# Altium PCB PCB.PcbDoc (part 2 of 2)
Units mm, origin at the board's own origin, x right, y up, seen from the top; angles counter-clockwise.
Board outline 130 x 130 mm, 2 copper layers (Top Layer, Bottom Layer), stack 1.571 mm thick; 113 components, 99 nets, 422 pads, 245 vias.
Unrouted connection lines stored in the file: 122.
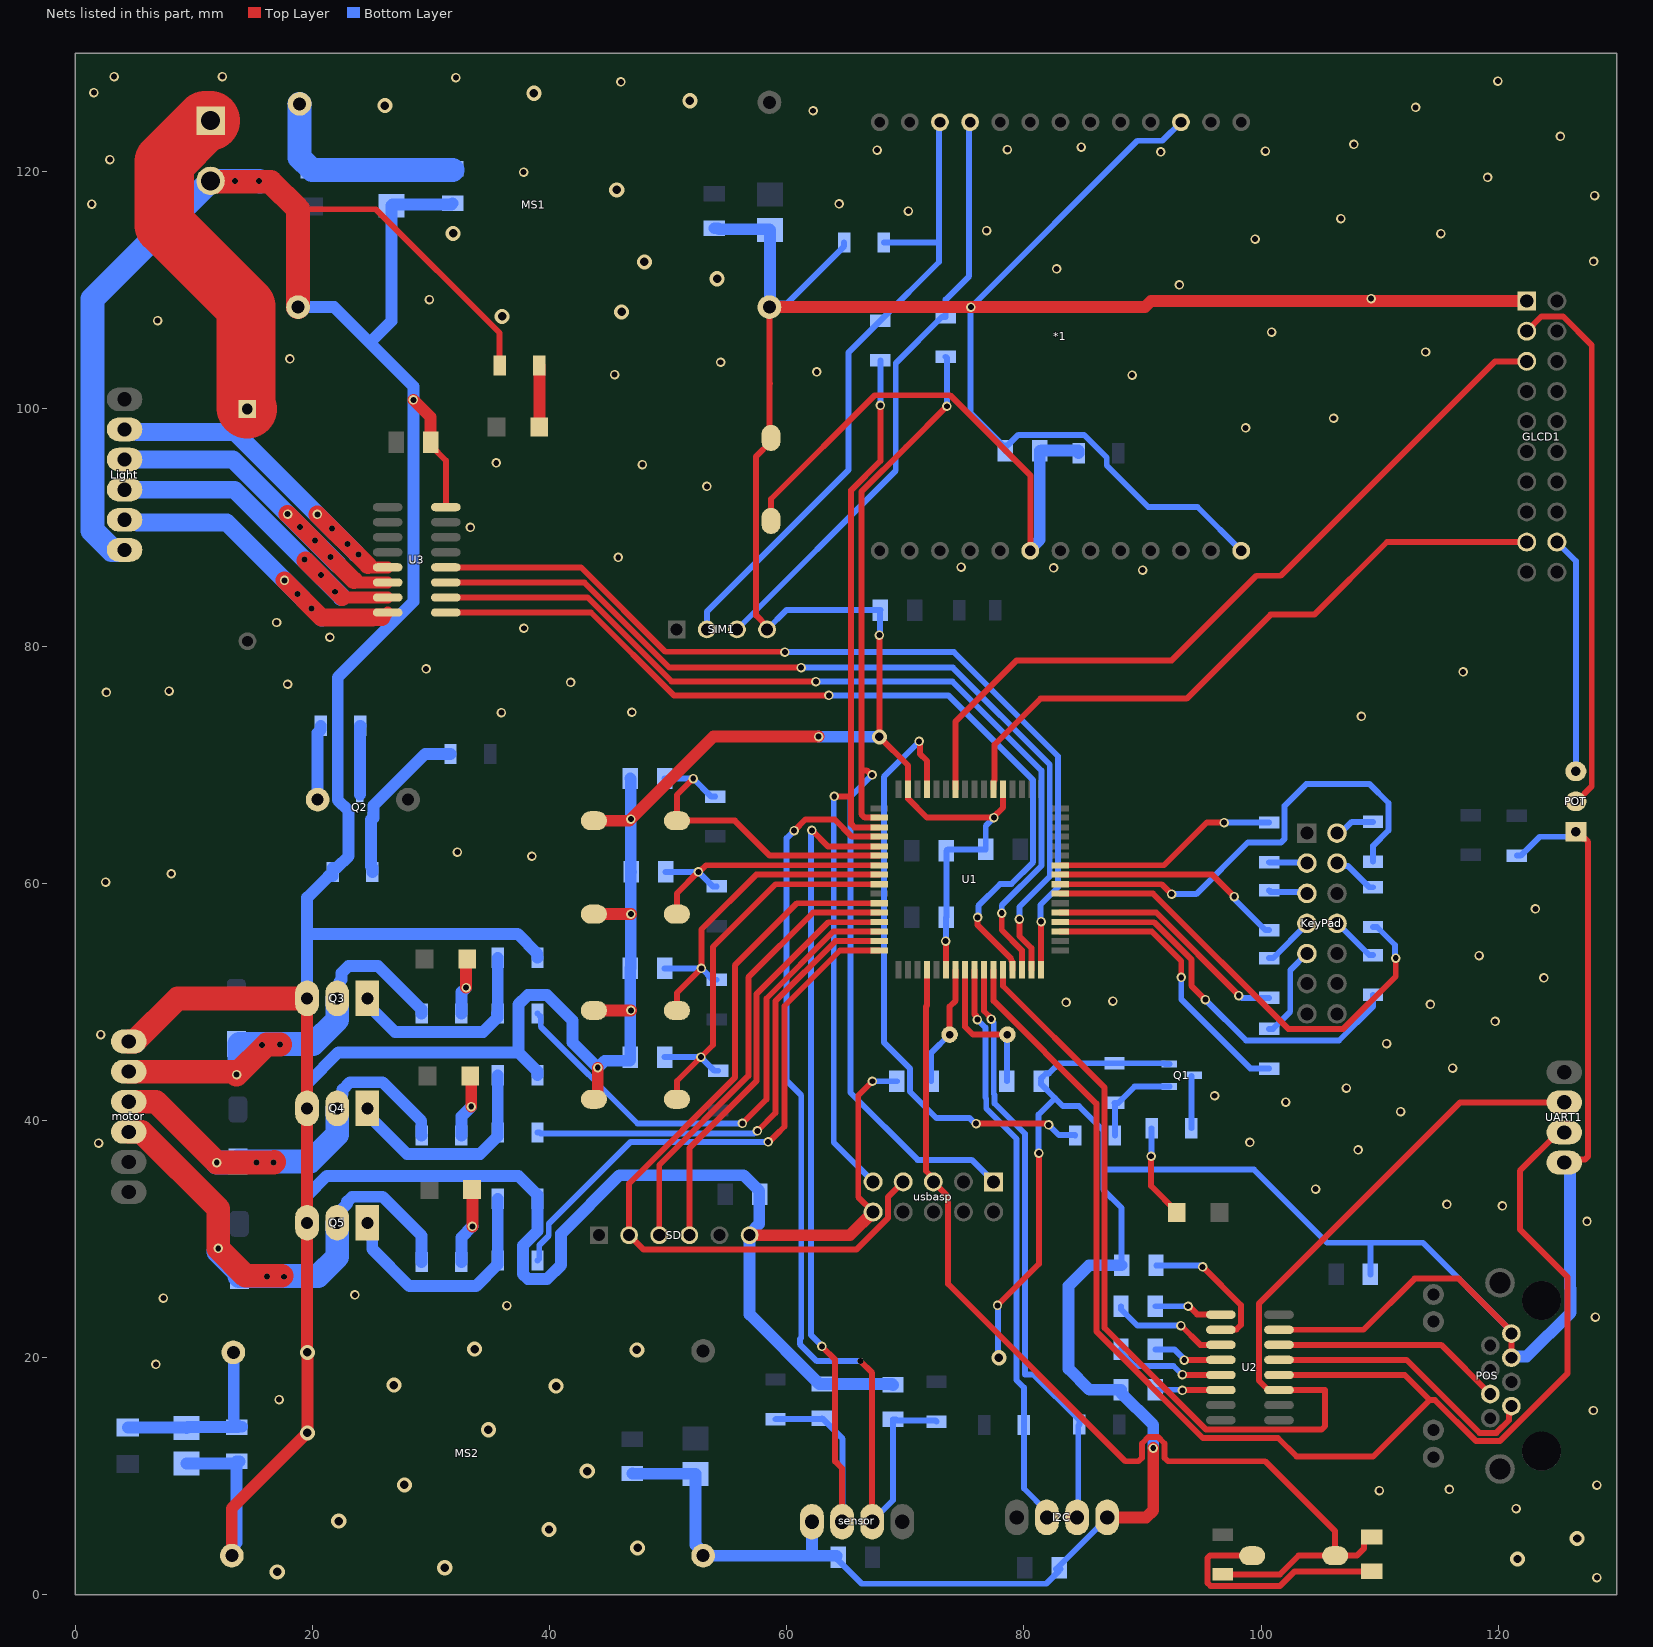
[diagram p2: the nets of this part, all layers, seen from the top]

## Via types
v1: diameter 0.8, hole 0.5, Top Layer to Bottom Layer, 184 vias
v2: diameter 0.5, hole 0.5, Top Layer to Bottom Layer, 29 vias
v3: diameter 1.27, hole 0.711, Top Layer to Bottom Layer, 28 vias
v4: diameter 7, hole 4, Top Layer to Bottom Layer, 4 vias

## Nets (pads, with @x,y where several pads share a name; then routed paths per layer and width w, separated by ;. In a path a pad name is that pad's centre, name@x,y a point inside that pad or via, vN(x,y) a via of type N, cw(c..) or ccw(c..) an arc to the next point about the centre after c; other vN are vias at no path point) (continued)
GND: *1.3 *1.26 C1.2 C2.2 C3.2 C4.2 C5.2 C6.2 C7.2 C8.2 C9.2 C10.2 C11.2 C12.2 C13.2 C14.2 C15.2 C16.2 C17.2 C18.2 C19.2 C20.2 C22.2 C24.2 C25.2 C26.2 C27.2 C28.2 C29.2 C30.1 C31.1 GLCD1.1 I2C.1 Light.1 motor.6 MS1.2 MS1.3 MS2.2 MS2.3 POS.1 POS.3 POT.1 Power.2 Q1.2 Q2.2 Q3.3 Q4.3 Q5.3 R8.1 R9.1 R10.1 R14.1 R19.1 R20.1 R22.1 R25.2 Reset1.1 RST_GSM.2 S2.1 S3.1 S4.1 S5.1 SD.6 sensor.4 SIM1.4 U1.22 U1.53 U1.63 U2.15 U3.8 UART1.4 usbasp.10 | length 999.7
  Top Layer w0.5: 18.796,116.84 25.349,116.84 35.793,106.397 R10.1@35.793,103.657 ; C31.1@29.974,96.93 31.254,95.651 U3.8@31.254,91.719 ; SIM1.4@58.344,81.407 58.344,81.678 57.424,82.597 57.424,96.006 58.674,97.256 RST_GSM.2@58.674,97.556 58.553,97.677 58.553,102.21 ; MS1.3@58.547,108.585 58.553,108.579 58.553,102.21 ; 58.604,102.159 58.553,102.21 ; v1(67.234,43.307) 66.035,42.108 66.035,33.533 usbasp.10@67.285,32.283 ; v1(67.818,80.924) v3(67.818,72.353) 70.231,69.94 U1.63@70.231,67.945 70.235,67.941 70.235,67.127 71.83,65.532 v1(77.47,65.532) 77.47,65.613 78.232,66.375 U1.53@78.232,67.945 ; v1(73.406,55.118) 73.427,55.097 73.427,52.709 U1.22@73.431,52.705 ; v1(77.775,24.409) 81.261,27.896 v1(81.261,37.255) ; Reset1.1@99.243,3.302 95.682,3.302 95.474,3.094 95.474,1.019 95.738,0.755 101.605,0.755 102.829,1.979 C8.2@109.347,1.979 ; U2.15@101.51,22.352 108.636,22.352 112.949,26.665 116.681,26.665 121.107,22.239 POS.1@121.107,22.036 POS.3@121.107,19.996 ; UART1.4@125.56,36.449 125.804,36.693 127.291,36.693 127.584,36.986 127.584,63.495 127.291,63.788 127.118,63.788 POT.1@126.543,64.364
  Top Layer w1: MS2.2@13.208,3.302 13.208,7.29 v3(19.583,13.665) v3(19.583,20.447) 19.558,20.472 Q5.3@19.558,31.369 Q4.3@19.558,41.021 Q3.3@19.558,50.292 ; v1(28.524,100.762) 29.974,99.312 C31.1@29.974,97.18 C31.1@29.974,96.93 ; S2.1@43.688,65.334 S2.1@43.744,65.278 46.736,65.278 v1(46.863,65.405) 53.823,72.365 v1(62.687,72.365) ; S5.1@43.744,41.783 43.792,41.783 44.069,42.06 v1(44.069,44.45) ; S4.1@43.744,49.276 v1(46.863,49.276) ; S3.1@43.744,57.404 v1(46.863,57.404) ; SD.6@56.871,30.328 65.329,30.328 usbasp.10@67.285,32.283 ; MS1.3@58.604,108.642 58.661,108.585 v1(75.54,108.585) 90.206,108.585 90.714,109.093 GLCD1.1@122.403,109.093 ; I2C.1@87.02,6.528 90.321,6.528 90.907,7.114 v1(90.907,12.372)
  Top Layer w2: motor.6@4.521,46.66 5.021,46.66 8.653,50.292 Q3.3@19.558,50.292 ; Power.2@11.417,119.228 11.493,119.151 16.485,119.151 18.745,116.891 ; MS1.2@18.796,108.585 18.796,116.84
  Bottom Layer w0.5: C13.2@9.398,11.073 C13.2@9.575,11.25 ; SIM1.4@58.344,81.407 59.969,83.033 C4.2@67.892,83.033 67.855,82.996 67.855,80.961 v1(67.818,80.924) ; MS1.3@58.547,108.585 58.604,108.642 58.834,108.872 60,108.872 64.849,113.721 R14.1@64.849,114.046 ; C18.2@64.186,3.275 64.186,3.075 66.325,0.936 81.884,0.936 82.984,2.036 C5.2@82.984,2.178 ; 65.837,17.78 65.889,17.728 ; v1(67.234,43.307) C7.2@69.289,43.307 ; v1(73.406,55.118) 73.432,55.144 73.432,57.124 C2.2@73.459,57.15 C1.2@73.459,62.738 73.586,62.865 C3.2@76.782,62.865 76.782,64.844 v1(77.47,65.532) ; v1(77.775,24.409) 77.83,24.354 77.83,20.048 v3(77.886,19.992) ; C17.2@78.433,96.469 78.433,96.719 C17.2@78.216,96.936 ; v1(81.261,37.255) 81.243,37.274 81.243,40.501 82.629,41.888 ; C6.2@81.46,43.307 81.46,43.057 82.629,41.888 ; C6.2@81.46,43.557 81.86,43.957 82.11,43.957 82.98,44.827 R8.1@87.63,44.827 91.849,44.827 91.911,44.765 Q1.2@92.261,44.765 ; I2C.1@87.02,6.477 82.721,2.178 C5.2@82.984,2.178 ; C22.2@88.237,27.788 88.237,32.637 86.703,34.172 86.703,35.865 ; *1.3@93.243,124.181 91.679,122.616 89.571,122.616 v1(75.54,108.585) 75.514,108.56 75.514,99.638 C17.2@78.216,96.936 ; *1.26@98.323,88.041 94.633,91.731 90.484,91.731 86.985,95.23 86.985,95.902 85.068,97.819 79.533,97.819 78.65,96.936 C17.2@78.216,96.936 ; C24.2@109.222,27.026 109.222,29.555 109.36,29.693 ; POS.1@121.107,22.036 121.107,22.239 113.654,29.693 109.36,29.693 ; R25.2@121.564,62.33 121.889,62.33 123.485,63.926 126.105,63.926 POT.1@126.543,64.364 ; 82.629,41.888 83.303,41.214 84.643,41.214 86.703,39.154 86.703,35.865 ; C5.2@82.984,2.178 C5.2@82.984,2.286 83.092,2.178 C5.2@82.984,2.178 ; 86.703,35.865 99.39,35.865 105.562,29.693 109.36,29.693
  Bottom Layer w1: C13.2@9.398,11.073 C16.2@13.614,11.073 ; MS2.2@13.208,3.302 13.399,3.493 13.399,4.173 13.614,4.388 C16.2@13.614,11.073 ; C16.2@13.614,11.25 C16.2@13.614,11.073 ; C16.2@13.847,11.25 13.67,11.073 C16.2@13.614,11.073 ; MS1.2@18.796,108.585 20.779,108.585 21.844,108.585 24.854,105.575 ; Q5.3@19.558,31.369 19.558,33.655 21.234,35.331 37.38,35.331 38.985,33.726 R22.1@38.985,33.401 38.985,30.678 37.76,29.453 37.76,27.054 38.17,26.644 39.8,26.644 40.97,27.814 40.97,30.455 45.898,35.382 56.361,35.382 57.685,34.058 57.685,31.277 56.871,30.463 SD.6@56.871,30.328 56.871,23.651 62.742,17.78 C20.2@62.992,17.78 65.837,17.78 68.887,17.78 C19.2@68.961,17.706 ; Q4.3@19.558,41.021 19.558,43.104 22.2,45.746 37.379,45.746 ; Q3.3@19.558,50.292 19.558,55.728 ; R9.1@21.721,60.635 21.696,60.61 21.371,60.61 19.558,58.797 19.558,55.728 ; R9.1@21.721,60.96 21.721,61.285 21.746,61.31 22.071,61.31 23.053,62.292 Q2.2@23.053,65.371 23.053,66.105 22.147,67.011 22.147,77.367 28.524,83.744 v1(28.524,100.762) 28.524,101.905 24.854,105.575 ; C12.2@31.826,117.346 31.724,117.244 26.772,117.244 C9.2@26.67,117.142 26.67,107.391 24.854,105.575 ; R20.1@38.985,43.815 38.985,44.14 37.379,45.746 ; R19.1@38.985,53.721 38.96,53.746 38.96,54.071 37.303,55.728 19.558,55.728 ; C26.2@46.81,68.834 46.847,68.797 46.847,60.997 C27.2@46.884,60.96 46.847,60.923 46.847,52.869 C28.2@46.81,52.832 C29.2@46.81,45.339 46.81,45.089 46.762,45.041 44.66,45.041 v1(44.069,44.45) 41.934,46.585 41.934,48.437 39.8,50.572 38.17,50.572 37.379,49.781 37.379,45.746 ; C15.2@46.99,10.234 47.015,10.209 52.299,10.209 C14.2@52.324,10.184 52.324,4.208 52.959,3.573 MS2.3@52.959,3.302 60.129,3.302 ; C11.2@53.899,115.238 54.209,115.238 54.299,115.148 58.536,115.148 C10.2@58.598,115.086 58.604,115.08 58.604,108.642 MS1.3@58.604,108.585 ; 60.274,3.302 62.128,3.302 ; sensor.4@62.128,6.172 62.128,3.302 ; v1(62.687,72.365) 62.699,72.353 v3(67.818,72.353) ; C18.2@64.186,3.275 64.186,3.302 62.128,3.302 ; C22.2@88.237,27.788 85.496,27.788 83.769,26.06 83.769,19.055 85.527,17.297 C25.2@88.187,17.297 88.187,17.047 90.907,14.327 v1(90.907,12.372) ; POS.3@121.107,19.996 121.217,20.106 122.402,20.106 126.097,23.801 126.097,25.831 126.035,25.893 126.035,35.987 125.573,36.449 UART1.4@125.56,36.449
  Bottom Layer w2: Light.1@4.166,88.113 3.094,88.113 1.466,89.741 1.466,109.276 Power.2@11.417,119.228 v2(13.468,119.228) v2(15.519,119.228) v2@15.596,119.151
  other v1: 128.321,1.448 121.514,7.264 109.982,8.788 115.875,8.89 128.321,9.246 128.016,15.545 17.196,16.459 6.807,19.431 128.194,23.419 36.398,24.384 7.442,25.019 23.597,25.298 127.483,31.496 120.345,32.791 115.672,32.918 104.597,34.214 108.179,37.516 1.981,38.1 99.06,38.151 111.76,40.742 102.083,41.554 96.088,42.088 107.188,42.723 116.154,44.425 110.592,46.482 2.159,47.244 119.736,48.362 114.275,49.784 83.566,49.962 87.503,50.063 123.85,52.019 118.389,53.899 123.139,57.836 2.565,60.096 8.103,60.808 38.506,62.281 32.233,62.636 108.458,74.066 35.941,74.397 46.939,74.422 2.642,76.098 7.925,76.2 17.907,76.784 41.783,76.937 117.043,77.826 29.591,78.08 21.488,80.747 37.846,81.509 16.993,81.991 90.018,86.411 82.499,86.589 74.701,86.665 45.796,87.478 33.325,90.018 53.264,93.472 47.828,95.301 35.509,95.453 98.704,98.4 106.121,99.212 89.129,102.845 45.491,102.895 62.535,103.124 54.432,103.937 18.11,104.216 113.868,104.8 100.889,106.477 6.96,107.442 29.87,109.22 109.271,109.296 93.116,110.465 82.753,111.811 128.041,112.446 99.492,114.325 115.164,114.783 76.86,115.037 106.731,116.053 70.256,116.688 1.397,117.272 64.414,117.297 128.118,117.983 119.101,119.532 37.821,119.964 2.921,121.031 91.542,121.666 100.355,121.742 67.615,121.818 78.613,121.869 84.836,122.072 107.823,122.301 125.247,122.987 62.23,125.146 113.03,125.425 1.575,126.67 46.025,127.584 119.964,127.635 32.106,127.94 3.277,128.016 12.421,128.016
  other v3: 17.043,1.93 31.166,2.286 121.625,3.025 47.431,3.965 126.644,4.75 39.954,5.512 22.225,6.223 27.762,9.271 43.18,10.439 34.849,13.919 40.564,17.602 26.873,17.678 47.371,20.65 33.68,20.726 36.001,107.8 46.076,108.179 54.137,110.975 48.006,112.395 31.877,114.808 45.669,118.466 26.111,125.578 51.841,125.984 38.684,126.619
IR_receive: C19.1 R27.1 sensor.2 U1.4 | length 85.2
  Top Layer w0.5: v1(60.63,64.44) 61.57,65.38 64.051,65.38 65.499,63.932 U1.4@67.818,63.932 ; v2(66.218,19.71) 67.208,18.72 sensor.2@67.208,6.172
  Bottom Layer w0.5: v1(60.63,64.44) 59.995,63.805 59.995,43.353 61.226,42.122 61.226,21.67 61.112,21.556 61.112,21.142 62.544,19.71 v2(66.218,19.71) ; sensor.2@67.234,6.248 68.961,7.976 C19.1@68.961,14.708 ; C19.1@69.211,14.806 C19.1@68.961,14.806 C19.1@68.961,14.708 ; R27.1@72.644,14.609 72.546,14.708 C19.1@68.961,14.708
IR_send: C20.1 R26.2 sensor.3 U1.5 | length 79.5
  Top Layer w0.5: v1(62.128,64.465) 63.475,63.119 U1.5@67.818,63.119 ; v1(62.967,20.947) 64.089,19.825 64.089,11.252 64.668,10.673 sensor.3@64.668,6.172
  Bottom Layer w0.5: R26.2@59.055,14.807 59.091,14.844 62.955,14.844 C20.1@62.992,14.88 64.719,13.153 sensor.3@64.719,5.723 ; v1(62.128,64.465) 62.071,64.408 62.071,64.196 62.041,64.166 62.041,21.935 62.967,21.009 v1(62.967,20.947)
Light-1: U1.29 U3.1 | length 75.1
  Top Layer w0.5: U3.1@31.254,82.829 43.493,82.829 50.478,75.844 v1(63.551,75.844) ; v1(76.098,57.125) 76.098,56.466 78.936,53.628 78.936,53.451 79.041,53.346 79.041,52.709 U1.29@79.045,52.705
  Bottom Layer w0.5: v1(63.551,75.844) 73.635,75.844 80.782,68.697 80.782,61.779 78.941,59.938 77.997,59.938 76.156,58.096 76.156,57.182 v1(76.098,57.125)
Light-2: U1.30 U3.2 | length 75.2
  Top Layer w0.5: U3.2@31.254,84.099 43.213,84.099 50.3,77.013 v1(62.459,77.013) ; v1(78.13,57.48) 78.13,56.056 79.832,54.354 U1.30@79.832,52.705
  Bottom Layer w0.5: v1(62.459,77.013) 73.965,77.013 81.482,69.496 81.482,61.489 78.13,58.137 v1(78.13,57.48)
Light-3: U1.31 U3.3 | length 76.1
  Top Layer w0.5: U3.3@31.254,85.369 42.933,85.369 50.122,78.181 v1(61.214,78.181) ; v1(79.629,56.972) 79.629,55.547 80.645,54.531 U1.31@80.645,52.705 U1.31@80.649,52.701
  Bottom Layer w0.5: v1(61.214,78.181) 74.016,78.181 82.182,70.015 82.182,60.567 79.629,58.014 v1(79.629,56.972)
Light-4: U1.32 U3.4 | length 76.9
  Top Layer w0.5: U3.4@31.254,86.639 42.653,86.639 49.765,79.527 59.817,79.527 v1(59.842,79.502) ; U1.32@81.432,52.705 81.436,52.709 81.436,56.748 v1(81.458,56.769)
  Bottom Layer w0.5: v1(59.842,79.502) 74.092,79.502 82.882,70.712 82.882,59.666 81.385,58.169 81.385,57.669 81.4,57.653 81.4,56.826 v1(81.458,56.769)
light-o-1: Light.2 U3.16 | length 29.9
  Top Layer w1: U3.16@26.111,82.649 26.174,82.649 U3.16@26.354,82.829
  Top Layer w1.5: v1(17.653,85.547) 20.779,82.421 25.045,82.421 25.054,82.429 25.854,82.429
  Bottom Layer w1.5: Light.2@4.166,90.653 4.261,90.557 5.115,90.557 5.248,90.424 12.776,90.424 v1(17.653,85.547) 20.803,82.398
  other v2: 19.939,83.16 18.745,84.379
light-o-2: Light.3 U3.15 | length 30.3
  Top Layer w1: 22.526,84.121 22.788,84.121 22.809,84.099 U3.15@26.354,84.099
  Top Layer w1.5: v2@19.431,87.216 22.526,84.121
  Bottom Layer w1.5: Light.3@4.166,93.193 13.445,93.193 16.207,90.431 22.454,84.184 22.454,84.125
  other v2: 21.895,84.582 20.726,85.979 19.33,87.308
light-o-3: Light.4 U3.14 | length 32.5
  Top Layer w1: 23.502,85.549 23.682,85.369 U3.14@26.354,85.369
  Top Layer w1.5: v1(17.907,91.135) 17.916,91.135 23.502,85.549
  Bottom Layer w1.5: Light.4@4.166,95.733 13.31,95.733 v1(17.907,91.135) 22.162,86.881
  other v2: 21.539,87.528 20.218,88.9 18.974,90.043
light-o-4: Light.5 U3.13 | length 31.7
  Top Layer w1: 24.705,86.819 24.885,86.639 U3.13@26.354,86.639
  Top Layer w1.5: v1(20.422,91.103) 24.705,86.819
  Bottom Layer w1.5: Light.5@4.166,98.273 4.261,98.177 5.115,98.177 5.248,98.044 13.481,98.044 v1(20.422,91.103) 23.698,87.826 v2@23.698,87.782
  other v2: 23.901,87.732 22.962,88.595 21.641,89.916
MISO: SD.4 U1.13 | length 35.6
  Top Layer w0.5: SD.4@51.791,30.328 51.791,37.669 57.469,43.348 57.469,50.673 63.514,56.718 U1.13@67.818,56.718
MOSI: SD.3 U1.12 | length 38.2
  Top Layer w0.5: SD.3@49.251,30.328 49.251,36.242 56.769,43.76 56.769,52.07 62.23,57.531 U1.12@67.818,57.531
motor_1: D3.1 motor.5 Q3.2 R15.1 | length 38.6
  Top Layer w2: motor.5@4.521,44.12 13.36,44.12 v1(13.614,43.866) 16.154,46.406 v2(17.272,46.406)
  Bottom Layer w1: D3.1@13.614,46.202 D3.1@13.854,46.441 ; Q3.2@22.098,50.292 22.289,50.483 22.289,51.69 22.467,51.868 22.467,52.444 23.053,53.03 25.531,53.03 29.214,49.347 R15.1@29.214,49.022
  Bottom Layer w1.5: v1(13.614,43.866) D3.1@13.614,46.202
  Bottom Layer w2: D3.1@13.854,46.441 20.05,46.441 22.098,48.489 Q3.2@22.098,50.292
  other v2: 15.748,46.355
motor_2: D2.1 motor.4 Q4.2 R16.1 | length 39.4
  Top Layer w2: motor.4@4.521,41.58 6.807,41.58 v1(11.938,36.449) v2(16.739,36.449) v2@16.789,36.5
  Bottom Layer w1: D2.1@13.63,36.449 D2.1@13.716,36.535 ; Q4.2@22.098,40.657 22.098,41.792 22.548,42.242 22.548,42.606 23.163,43.221 25.928,43.221 29.189,39.96 29.189,38.76 R16.1@29.214,38.735
  Bottom Layer w2: v1(11.938,36.449) D2.1@13.63,36.449 ; D2.1@13.716,36.535 19.822,36.535 22.098,38.811 Q4.2@22.098,41.021
  other v2: 15.291,36.449
motor_3: D4.1 motor.3 Q5.2 R17.1 | length 46.9
  Top Layer w2: motor.3@4.521,39.04 5.592,39.04 12.065,32.567 v1(12.065,29.21) 14.376,26.899 v2@17.399,26.899
  Bottom Layer w1: v1@12.065,28.961 v1(12.065,29.21) ; D4.1@13.843,26.883 D4.1@13.843,27.183 ; Q5.2@22.098,31.369 22.098,32.14 22.938,32.98 22.938,33.159 23.348,33.569 25.928,33.569 29.214,30.283 R17.1@29.214,28.067
  Bottom Layer w2: v1@12.065,28.961 D4.1@13.843,27.183 ; D4.1@13.843,26.883 20.482,26.883 22.098,28.499 Q5.2@22.098,31.369
  other v2: 17.602,26.822 16.18,26.848
motor_con_1: R18.2 U1.14 | length 44.8
  Top Layer w0.5: v1(56.261,39.751) 58.293,41.783 58.293,50.292 63.932,55.931 U1.14@67.818,55.931
  Bottom Layer w0.5: R18.2@38.985,49.022 39.26,48.747 39.26,47.915 47.424,39.751 v1(56.261,39.751)
motor_con_2: R21.2 U1.15 | length 41.1
  Top Layer w0.5: v1(57.531,39.116) 59.042,40.627 59.042,50.051 64.109,55.118 U1.15@67.818,55.118
  Bottom Layer w0.5: R21.2@38.985,38.989 39.172,38.989 39.26,38.901 57.235,38.901 57.45,39.116 v1(57.531,39.116)
motor_con_3: R23.2 U1.16 | length 46.9
  Top Layer w0.5: v1(58.434,38.201) 58.515,38.201 59.107,38.794 59.114,38.794 59.817,39.497 59.817,49.657 64.491,54.331 U1.16@67.818,54.331
  Bottom Layer w0.5: R23.2@38.985,28.194 39.133,28.342 39.133,29.482 39.935,30.284 39.935,31.299 46.837,38.201 v1(58.434,38.201)
NetC9_1: C9.1 C12.1 F1.2 MS1.1 | length 17.9
  Bottom Layer w2: MS1.1@18.923,125.73 18.923,121.209 F1.2@19.964,120.168 19.99,120.142 C9.1@26.67,120.142 C12.1@31.826,120.142
NetC13_1: C13.1 C16.1 F3.2 MS2.1 | length 15.2
  Bottom Layer w1: F3.2@4.445,14.123 4.47,14.098 9.373,14.098 C13.1@9.398,14.073 ; C13.1@9.465,14.14 C16.1@13.735,14.14 ; 13.373,14.915 MS2.1@13.373,20.409 ; C16.1@13.697,14.3 13.818,14.179 C16.1@14.068,14.179
NetC21_1: C21.1 U2.1 | length 5.8
  Top Layer w0.5: v1(93.853,24.333) 93.934,24.333 94.61,23.657 96.575,23.657 U2.1@96.61,23.622
  Bottom Layer w0.5: C21.1@91.112,24.333 v1@93.878,24.333
NetC21_2: C21.2 U2.3 | length 9.9
  Top Layer w0.5: v1(93.243,22.708) 94.869,21.082 U2.3@96.61,21.082
  Bottom Layer w0.5: C21.2@88.187,24.333 88.187,24.083 89.562,22.708 ; 89.588,22.708 v1@93.269,22.708
NetC22_1: C22.1 U2.2 | length 12.1
  Top Layer w0.5: v1(95.072,27.661) 98.31,24.423 98.31,22.77 97.93,22.39 96.648,22.39 U2.2@96.61,22.352
  Bottom Layer w0.5: C22.1@91.163,27.788 v1@94.889,27.788 ; v1@94.864,27.788 94.991,27.661 v1(95.072,27.661)
NetC23_1: C23.1 U2.4 | length 6
  Top Layer w0.5: v1(93.523,19.787) 93.535,19.799 96.597,19.799 U2.4@96.61,19.812
  Bottom Layer w0.5: C23.1@91.112,20.701 92.71,20.701 ; 92.685,20.701 v1@93.599,19.787
NetC23_2: C23.2 U2.5 | length 9.4
  Top Layer w0.5: v1(93.37,18.567) 93.383,18.555 96.597,18.555 U2.5@96.61,18.542
  Bottom Layer w0.5: C23.2@88.187,20.701 88.187,20.451 89.341,19.296 ; 89.367,19.296 92.616,19.296 v1@93.37,18.542
NetC25_1: C25.1 U2.6 | length 5.6
  Top Layer w0.5: v1(93.37,17.247) 93.383,17.259 96.597,17.259 U2.6@96.61,17.272
  Bottom Layer w0.5: C25.1@91.112,17.297 93.421,17.297 v1@93.447,17.272
NetD1_2: D1.2 R10.2 | length 5.2
  Top Layer w1: D1.2@39.143,98.48 R10.2@39.143,103.657
NetD5_2: D5.2 R15.2 | length 5.1
  Top Layer w1: v1(32.969,51.206) 32.969,53.521 D5.2@33.067,53.619
  Bottom Layer w1: R15.2@32.564,49.347 R15.2@32.564,49.022 32.589,49.047 32.589,50.826 v1(32.969,51.206)
NetD6_2: D6.2 R16.2 | length 5.7
  Top Layer w1: D6.2@33.321,43.739 33.401,43.659 v1(33.401,41.173)
  Bottom Layer w1: R16.2@32.564,39.06 R16.2@32.564,38.735 32.589,38.76 32.589,40.361 v1(33.401,41.173)
NetD7_2: D7.2 R17.2 | length 6.5
  Top Layer w1: D7.2@33.474,34.163 33.503,34.134 v1(33.503,31.064)
  Bottom Layer w1: R17.2@32.564,28.067 32.564,30.126 v1(33.503,31.064)
NetF2_1: F2.1 Power.1 | length 29.1
  Top Layer w5: Power.1@11.417,124.308 10.981,124.308 7.517,120.843 7.517,115.515 14.402,108.63 14.402,100.101 F2.1@14.503,100
NetGLCD1_3: GLCD1.3 POT.2 | length 46.1
  Top Layer w0.5: GLCD1.3@122.403,106.553 123.653,107.803 125.46,107.803 127.882,105.382 127.882,68.179 126.606,66.904 POT.2@126.543,66.904
NetJ1_6: POS.6 U2.14 | length 19.5
  Top Layer w0.5: U2.14@101.51,21.082 115.181,21.082 POS.6@119.327,16.936
NetJ1_7: POS.7 U2.13 | length 23.7
  Top Layer w0.5: U2.13@101.51,19.812 112.268,19.812 118.422,13.658 119.84,13.658 120.902,14.72 120.902,15.71 POS.7@121.107,15.916
NetKeyPad1_2: KeyPad.2 R32.2 | length 3.4
  Bottom Layer w0.5: KeyPad.2@106.401,64.237 106.712,64.237 107.653,65.178 R32.2@109.449,65.178
NetKeyPad1_3: KeyPad.3 R33.1 | length 3.2
  Bottom Layer w0.5: R33.1@100.686,61.776 100.725,61.736 103.821,61.736 KeyPad.3@103.861,61.697
NetKeyPad1_4: KeyPad.4 R34.2 | length 3.9
  Bottom Layer w0.5: KeyPad.4@106.401,61.697 106.621,61.477 107.312,61.477 109.124,59.665 R34.2@109.449,59.665
NetKeyPad1_5: KeyPad.5 R35.1 | length 3.3
  Bottom Layer w0.5: R35.1@100.686,59.407 100.811,59.282 103.736,59.282 KeyPad.5@103.861,59.157
NetKeyPad1_7: KeyPad.7 R36.1 | length 4.4
  Bottom Layer w0.5: R36.1@100.686,53.692 101.011,53.692 103.861,56.542 KeyPad.7@103.861,56.617
NetKeyPad1_8: KeyPad.8 R37.2 | length 4.2
  Bottom Layer w0.5: KeyPad.8@106.401,56.617 106.457,56.617 109.124,53.95 R37.2@109.449,53.95
NetKeyPad1_9: KeyPad.9 R38.1 | length 7.9
  Bottom Layer w0.5: R38.1@100.686,47.723 101.011,47.723 102.463,49.175 102.463,52.679 KeyPad.9@103.861,54.077
NetLS1_2: LS1.2 R5.1 | length 6.3
  Bottom Layer w1: LS1.2@20.447,67.056 20.447,72.696 20.705,72.954 R5.1@20.705,73.279
NetON1_2: ON1.2 R4.2 | length 8
  Top Layer w0.5: v1(90.729,36.982) 90.729,34.47 92.891,32.308 ON1.2@92.891,32.258
  Bottom Layer w0.5: v1(90.729,36.982) 90.754,37.007 90.754,39.32 R4.2@90.778,39.345
NetQ1_1: Q1.1 R6.1 R8.2 | length 8
  Bottom Layer w0.5: R6.1@87.678,38.735 87.678,41.429 R8.2@87.63,41.477 87.955,41.477 89.343,42.865 Q1.1@92.261,42.865
NetQ1_3: Q1.3 R4.1 | length 4.4
  Bottom Layer w0.5: R4.1@94.128,39.345 94.128,43.765 Q1.3@94.133,43.765
NetQ2_1: Q2.1 R7.1 R9.2 | length 14.1
  Bottom Layer w1: R9.2@25.071,60.96 25.071,61.285 24.953,61.403 Q2.1@24.953,65.371 25.003,65.371 25.153,65.521 25.153,66.546 29.524,70.917 R7.1@31.652,70.917
NetQ2_3: Q2.3 R5.2 | length 5.8
  Bottom Layer w1: Q2.3@24.003,67.471 24.03,67.498 24.03,73.254 R5.2@24.055,73.279
NetQ3_1: Q3.1 R18.1 R19.2 | length 18.5
  Bottom Layer w1: Q3.1@24.638,50.792 Q3.1@24.638,50.292 24.638,49.792 26.958,47.472 34.41,47.472 35.635,48.697 R18.1@35.635,49.022 ; R18.1@35.554,49.024 35.635,49.105 R19.2@35.635,53.721
NetQ4_1: Q4.1 R20.2 R21.1 | length 19.1
  Bottom Layer w1: Q4.1@24.638,41.521 Q4.1@24.638,41.021 24.638,40.521 27.974,37.185 34.156,37.185 35.635,38.664 R21.1@35.635,38.989 R20.2@35.635,43.815
NetQ5_1: Q5.1 R22.2 R23.1 | length 20.5
  Bottom Layer w1: Q5.1@24.638,31.369 25.052,30.955 25.052,29.162 28.179,26.035 33.801,26.035 35.635,27.869 R23.1@35.635,28.194 R22.2@35.635,33.401
PC0: R38.2 U1.35 | length 24.3
  Top Layer w0.5: U1.35@83.058,55.931 90.78,55.931 93.269,53.442 v1(93.269,52.07)
  Bottom Layer w0.5: v1(93.269,52.07) 93.269,50.215 99.086,44.399 100.66,44.399 R38.2@100.686,44.373
PC1: R37.1 U1.36 | length 34
  Top Layer w0.5: U1.36@83.058,56.718 90.982,56.718 94.119,53.582 94.119,51.372 v1(95.301,50.19)
  Bottom Layer w0.5: v1(95.301,50.19) 98.744,46.748 106.565,46.748 109.449,49.632 R37.1@109.449,50.6
PC2: R36.2 U1.37 | length 20.6
  Top Layer w0.5: U1.37@83.058,57.531 91.159,57.531 98.12,50.57 v1(98.12,50.521)
  Bottom Layer w0.5: v1(98.12,50.521) 98.201,50.521 98.38,50.342 R36.2@100.686,50.342
PC4: R34.1 U1.39 | length 40
  Top Layer w0.5: U1.39@83.058,59.131 90.881,59.131 102.291,47.722 106.929,47.722 111.354,52.146 v1(111.354,53.696)
  Bottom Layer w0.5: R34.1@109.449,56.315 109.774,56.315 111.296,54.792 111.296,53.753 v1(111.354,53.696)
PC5: R32.1 U1.40 | length 39.7
  Top Layer w0.5: U1.40@83.058,59.919 91.618,59.919 v1(92.456,59.08)
  Bottom Layer w0.5: v1(92.456,59.08) 94.529,59.08 98.898,63.449 101.693,63.449 101.986,63.742 101.986,66.537 103.81,68.361 109.156,68.361 110.749,66.768 110.749,64.466 109.449,63.166 R32.1@109.449,61.828
PC6: R35.2 U1.41 | length 19.7
  Top Layer w0.5: U1.41@83.058,60.731 95.885,60.731 v1(97.739,58.877)
  Bottom Layer w0.5: v1(97.739,58.877) 97.797,58.82 97.797,58.621 100.361,56.057 R35.2@100.686,56.057
PC7: R33.2 U1.42 | length 19.1
  Top Layer w0.5: U1.42@83.058,61.519 91.821,61.519 95.428,65.126 v1(96.876,65.126)
  Bottom Layer w0.5: v1(96.876,65.126) R33.2@100.686,65.126
R/W: GLCD1.5 U1.58 | length 66.4
  Top Layer w0.5: U1.58@74.244,67.945 74.244,73.66 79.386,78.802 92.469,78.802 99.598,85.931 101.654,85.931 119.736,104.013 GLCD1.5@122.403,104.013
Reset: C8.1 R3.1 Reset1.2 U1.20 usbasp.5 | length 88
  Top Layer w0.5: U1.20@71.831,52.705 71.831,49.7 71.741,49.61 71.741,35.745 72.365,35.121 usbasp.5@72.365,34.823 73.615,33.573 73.615,26.207 88.557,11.265 89.664,11.265 89.957,11.558 89.957,12.766 90.513,13.322 91.3,13.322 91.857,12.766 91.857,11.558 92.149,11.265 100.343,11.265 106.243,5.365 Reset1.2@106.243,3.302 ; R3.1@96.774,1.73 101.59,1.73 103.162,3.302 Reset1.2@106.243,3.302 ; C8.1@109.347,4.879 109.097,4.879 108.697,4.479 108.697,3.922 108.077,3.302 Reset1.2@106.243,3.302
RST: *1.19 C17.1 R11.1 RST_GSM.1 | length 48.8
  Top Layer w0.5: RST_GSM.1@58.674,90.556 58.674,92.406 67.422,101.155 73.783,101.155 80.543,94.395 *1.19@80.543,88.041
  Bottom Layer w1: *1.19@80.543,88.041 80.543,88.176 81.333,88.966 C17.1@81.333,96.469 81.458,96.469 81.483,96.495 84.585,96.495 84.61,96.47 R11.1@84.61,96.266
RST_glcd: GLCD1.17 U1.54 | length 55.7
  Top Layer w0.5: U1.54@77.445,67.945 77.449,67.949 77.449,68.586 77.528,68.665 77.528,71.686 81.407,75.565 93.726,75.565 100.813,82.652 104.496,82.652 110.617,88.773 GLCD1.17@122.403,88.773
RX: *1.11 R12.2 R14.2 SIM1.2 | length 55.6
  Bottom Layer w0.5: SIM1.2@53.264,81.407 53.264,82.906 65.227,94.869 65.227,104.775 R12.2@67.894,107.442 72.847,112.395 72.847,114.122 ; R14.2@68.199,114.046 72.771,114.046 72.847,114.122 ; *1.11@72.923,124.181 72.847,124.104 72.847,114.122
SCK: SD.2 U1.11 usbasp.7 | length 67.8
  Top Layer w0.5: U1.11@67.818,58.318 60.858,58.318 55.626,53.086 55.626,43.607 46.711,34.692 SD.2@46.711,30.328 47.911,29.128 65.897,29.128 68.535,31.766 68.535,33.533 usbasp.7@69.825,34.823
SCL: I2C.3 R2.1 U1.25 | length 48.7
  Top Layer w0.5: U1.25@75.844,52.705 75.844,48.951 76.016,48.78 76.016,48.571 v1(76.073,48.514)
  Bottom Layer w0.5: v1(76.073,48.514) 76.76,47.827 76.76,41.931 76.826,41.865 76.826,41.004 79.395,38.436 79.395,33.547 79.375,33.527 79.375,18.102 80.006,17.471 R2.1@80.006,14.326 80.006,8.962 81.94,7.028 I2C.3@81.94,6.528
SDA: I2C.2 R1.1 U1.26 | length 50
  Top Layer w0.5: U1.26@76.632,52.705 76.632,49.238 77.246,48.625 v1(77.246,48.544)
  Bottom Layer w0.5: v1(77.246,48.544) 77.246,48.462 77.46,48.248 77.46,42.221 77.526,42.154 77.526,41.447 80.095,38.879 80.095,18.584 80.801,18.584 84.684,14.701 R1.1@84.684,14.376 84.582,14.275 84.582,6.629 I2C.2@84.48,6.528
Start_LED: R6.2 U1.61 | length 51.4
  Top Layer w0.5: v1(71.171,71.958) 71.228,71.901 71.228,70.923 71.827,70.324 71.827,67.949 U1.61@71.831,67.945 ; v1(75.976,39.73) 81.905,39.73 82.012,39.624 v1(82.093,39.624)
  Bottom Layer w0.5: v1(71.171,71.958) 68.189,68.976 68.189,46.593 70.389,44.393 70.389,42.438 72.63,40.197 75.428,40.197 75.895,39.73 v1(75.976,39.73) ; v1(82.093,39.624) 82.956,38.76 84.303,38.76 R6.2@84.328,38.735
SW_1: C26.1 R28.1 S2.2 U1.6 | length 27.3
  Top Layer w0.5: v1(52.122,68.834) 50.744,67.456 S2.2@50.744,65.278 55.626,65.278 58.572,62.332 U1.6@67.818,62.332
  Bottom Layer w0.5: C26.1@49.71,68.834 v1(52.122,68.834) 53.65,67.306 R28.1@53.975,67.306
SW_2: C27.1 R29.1 S3.2 U1.7 | length 24.6
  Top Layer w0.5: S3.2@50.744,57.404 50.744,59.149 v1(52.555,60.96) 52.636,60.96 53.195,61.519 U1.7@67.818,61.519
  Bottom Layer w0.5: C27.1@49.784,60.96 v1(52.555,60.96) 53.777,59.738 R29.1@54.102,59.738
SW_3: C28.1 R30.1 S4.2 U1.8 | length 29.4
  Top Layer w0.5: S4.2@50.744,49.276 50.744,50.767 v1(52.809,52.832) 52.809,56.111 57.429,60.731 U1.8@67.818,60.731
  Bottom Layer w0.5: C28.1@49.71,52.832 v1(52.809,52.832) 53.777,51.864 R30.1@54.102,51.864
SW_4: C29.1 R31.1 S5.2 U1.9 | length 35.3
  Top Layer w0.5: S5.2@50.744,41.783 50.744,43.326 53.783,46.365 53.783,54.646 59.056,59.919 U1.9@67.818,59.919
  Bottom Layer w0.5: C29.1@49.71,45.339 v1(52.757,45.339) 53.904,44.192 R31.1@54.229,44.192
TX: *1.10 R13.2 SIM1.3 | length 51.1
  Bottom Layer w0.5: SIM1.3@55.804,81.407 69.194,94.797 69.194,103.861 73.081,107.748 R13.2@73.406,107.748 73.406,109.22 75.387,111.201 75.387,124.104 *1.10@75.463,124.181
uRX: R13.1 U1.2 usbasp.1 | length 87.1
  Top Layer w0.5: v1(67.208,69.139) 67.127,69.139 66.746,69.52 66.294,69.52 ; U1.2@67.818,65.532 66.59,65.532 66.294,65.828 66.294,69.52 ; v1(73.508,100.228) 70.075,96.796 66.294,93.015 66.294,69.52
  Bottom Layer w0.5: v1(67.208,69.139) 65.38,67.31 65.38,42.342 71.044,36.678 75.59,36.678 usbasp.1@77.445,34.823 ; R13.1@73.406,104.398 73.508,104.296 v1(73.508,100.228)
uRX_1: U1.27 U2.12 UART1.3 | length 121.4
  Top Layer w0.5: U1.27@77.445,52.705 77.445,50.087 86.107,41.424 86.107,22.213 95.089,13.232 101.424,13.232 102.996,11.66 109.45,11.66 114.224,16.434 ; U2.12@101.51,18.542 112.116,18.542 114.224,16.434 ; UART1.3@125.56,38.989 125.06,38.989 121.818,35.747 121.818,30.815 125.847,26.786 125.847,18.676 120.13,12.958 118.132,12.958 114.656,16.434 114.224,16.434
uTX: R12.1 U1.3 usbasp.9 | length 78
  Top Layer w0.5: v1(64.008,67.335) 65.405,67.335 65.43,67.31 ; U1.3@67.818,64.719 65.723,64.719 65.43,65.012 65.43,67.31 ; v1(67.894,100.305) 67.894,95.605 65.43,93.141 65.43,67.31
  Bottom Layer w0.5: v1(64.008,67.335) 63.969,67.296 63.969,38.139 usbasp.9@67.285,34.823 ; R12.1@67.894,104.092 v1(67.894,100.305) v1@67.92,100.279
uTX_1: U1.28 U2.11 UART1.2 | length 104.2
  Top Layer w0.5: U1.28@78.232,52.705 78.232,51.333 86.807,42.758 86.807,22.503 95.379,13.932 105.092,13.932 105.385,14.225 105.385,17.272 U2.11@101.51,17.272 100.61,17.272 99.81,18.072 99.81,24.558 116.781,41.529 UART1.2@125.56,41.529
Vout: GLCD1.18 POT.3 | length 20
  Bottom Layer w0.5: GLCD1.18@124.943,88.773 126.543,87.173 POT.3@126.543,69.444
Xtal1: C6.1 U1.24 Y1.2 | length 12.6
  Top Layer w0.5: U1.24@75.032,52.705 75.032,47.904 75.692,47.244 Y1.2@78.613,47.244
  Bottom Layer w0.5: C6.1@78.56,43.307 78.587,43.333 78.587,47.218 Y1.2@78.613,47.244
Xtal2: C7.1 U1.23 Y1.1 | length 10.2
  Top Layer w0.5: Y1.1@73.733,47.244 73.733,49.597 74.244,50.108 U1.23@74.244,52.705
  Bottom Layer w0.5: C7.1@72.189,43.307 72.189,45.7 Y1.1@73.733,47.244
pads on no net: *1.4 *1.5 *1.6 *1.7 *1.8 *1.9 *1.12 *1.13 *1.14 *1.15 *1.16 *1.17 *1.18 *1.20 *1.21 *1.22 *1.23 *1.24 *1.25 KeyPad.1 KeyPad.6 KeyPad.10 KeyPad.11 KeyPad.12 KeyPad.13 KeyPad.14 motor.2 POS.2 POS.4 POS.5 POS.8 POS.9 POS.10 POS.11 POS.12 POS.13 POS.14 POS.15 POS.16 U1.1 U1.17 U1.18 U1.19 U1.33 U1.34 U1.38 U1.43 U2.7 U2.8 U2.9 U2.10 U3.5 U3.6 U3.7 U3.10 U3.11 U3.12 usbasp.3 usbasp.4 usbasp.6 usbasp.8
copper on no net:
  other v1: 79.604,41.402
  other v4: 7,4 115,4 7,70.5 115,70.5

## Silkscreen, mask and mechanical layers (free items; w line width, h text height)
Top Overlay:
  text "5+" at 98.028,125.906 h2.5 r90
  text "GND" at 94.667,125.758 h1.5 r90
  text "+12" at 16.515,122.337 h2.5 r90
  text "GND" at 16.515,115.893 h2.5 r90
  text "GLCD" at 120.625,115.028 h2.5
  text "+12" at 2.119,103.398 h2.5
  text "GND" at 1.517,82.875 h2.5
  text "Tx" at 56.439,76.556 h1.52 r90
  text "RX" at 53.772,76.429 h1.52 r90
  text "5+" at 51.648,75.97 h2.5 r90
  text "GND" at 59.619,73.806 h2.5 r90
  text "GND" at 1.517,49.55 h2.5
  text "5+" at 117.601,43.374 h2.5
  text "uTX" at 116.688,40.894 h1.52
  text "SCK" at 70.383,38.938 h1.52 r90
  text "RST" at 73.025,38.862 h1.52 r90
  text "uTX" at 67.716,38.811 h1.52 r90
  text "uRX" at 77.978,38.608 h1.52 r90
  text "uRX" at 116.637,38.176 h1.52
  text "GND" at 115.716,34.818 h2.5
  text "+12" at 1.865,28.519 h2.5
  text "MI" at 52.375,26.162 h1.5 r90
  text "MO" at 49.835,25.654 h1.5 r90
  text "CS" at 44.856,25.629 h1.5 r90
  text "5+" at 55.448,25.552 h2.5 r90
  text "5+" at 78.664,25.095 h2.5 r90
  text "SCK" at 47.396,24.13 h1.5 r90
  text "GND" at 58.451,23.082 h2.5 r90
  text "GND" at 68.433,22.777 h2.5 r90
  text "SDA" at 82.702,10.744 h1.52 r90
  text "SCL" at 84.963,10.744 h1.52 r90
  text "GND" at 88.194,10.585 h2.5 r90
  text "5+" at 80.239,10.516 h2.5 r90
  text "5+" at 70.51,10.363 h2.5 r90
  text "GND" at 63.378,10.306 h2.5 r90
Mechanical 1:
  the board outline again, w0.254

## Text inside footprints (layer, text, board x,y; h text height)
GLCD1: Top Overlay "2" at 124.413,110.953 h1.02 r270; Top Overlay "1" at 121.873,110.653 h1.02 r270; Top Overlay "20" at 124.473,84.973 h1.02 r270; Top Overlay "19" at 121.933,84.973 h1.02 r270
KeyPad: Top Overlay "14" at 106.031,47.267 h1 r270; Top Overlay "13" at 103.331,47.267 h1 r270; Top Overlay "2" at 106.031,66.667 h1 r270; Top Overlay "1" at 103.331,66.367 h1 r270
POT: Top Overlay "CW" at 125.324,69.52 h1 r90
SD: Top Overlay "1" at 41.504,29.82 h1
SIM1: Top Overlay "1" at 50.597,83.337 h1
usbasp: Top Overlay "1" at 79.005,35.353 h1.02 r180; Top Overlay "2" at 79.305,32.813 h1.02 r180; Top Overlay "10" at 66.025,32.753 h1.02 r180; Top Overlay "9" at 66.025,35.293 h1.02 r180